# Altium PCB 21-LAN.PcbDoc
Units mm, origin at the board's own origin, x right, y up, seen from the top; angles counter-clockwise.
Board outline 40 x 40 mm, 4 copper layers (Top Layer, Internal Plane 1, Internal Plane 2, Bottom Layer), stack 0.462 mm thick; 32 components, 30 nets, 130 pads, 0 vias.
Unrouted connection lines stored in the file: 82.
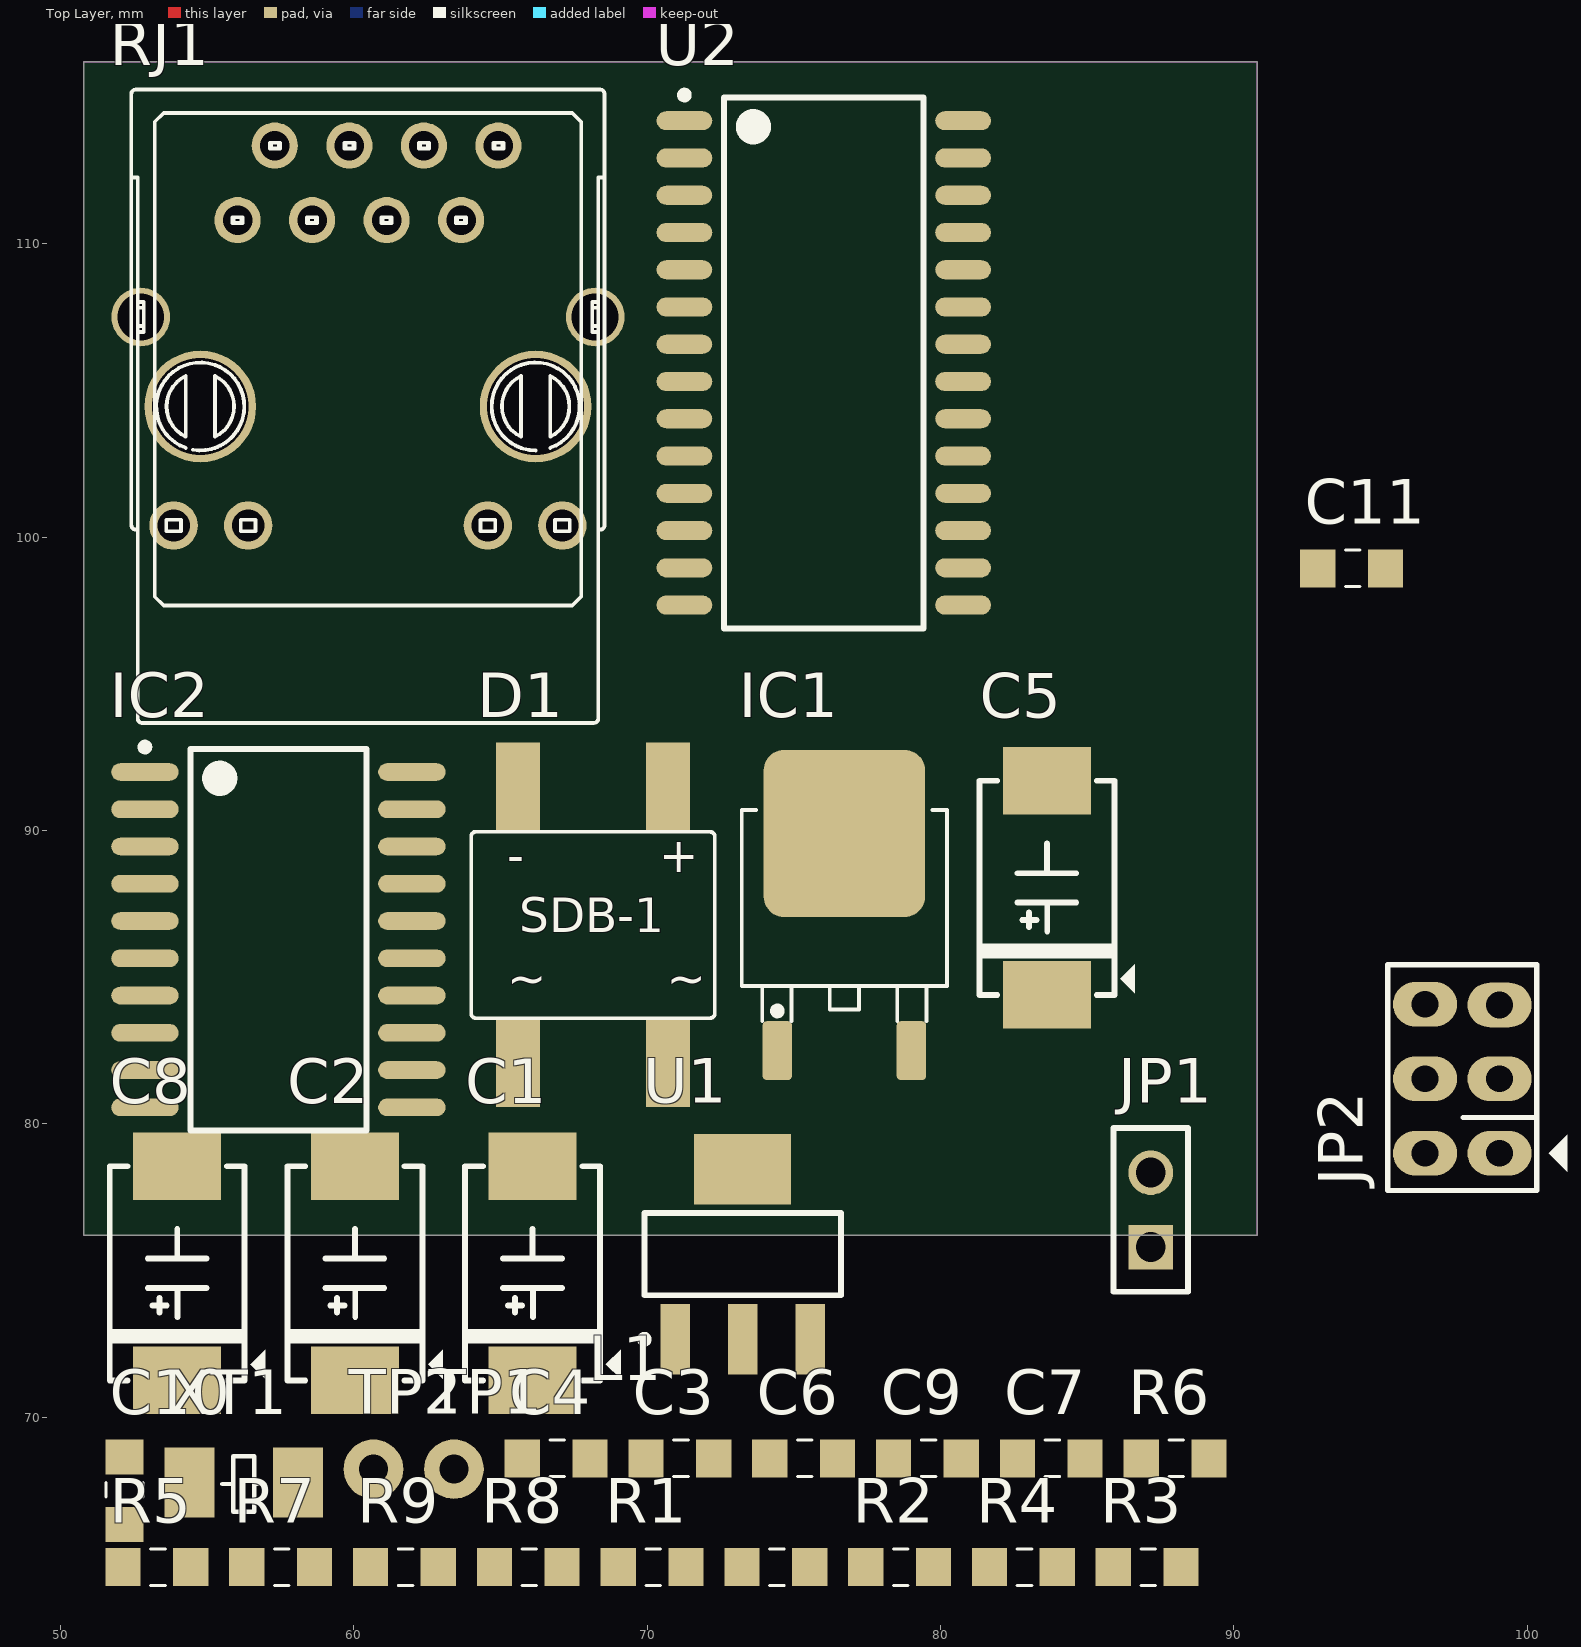
[diagram p0: Top Layer view]
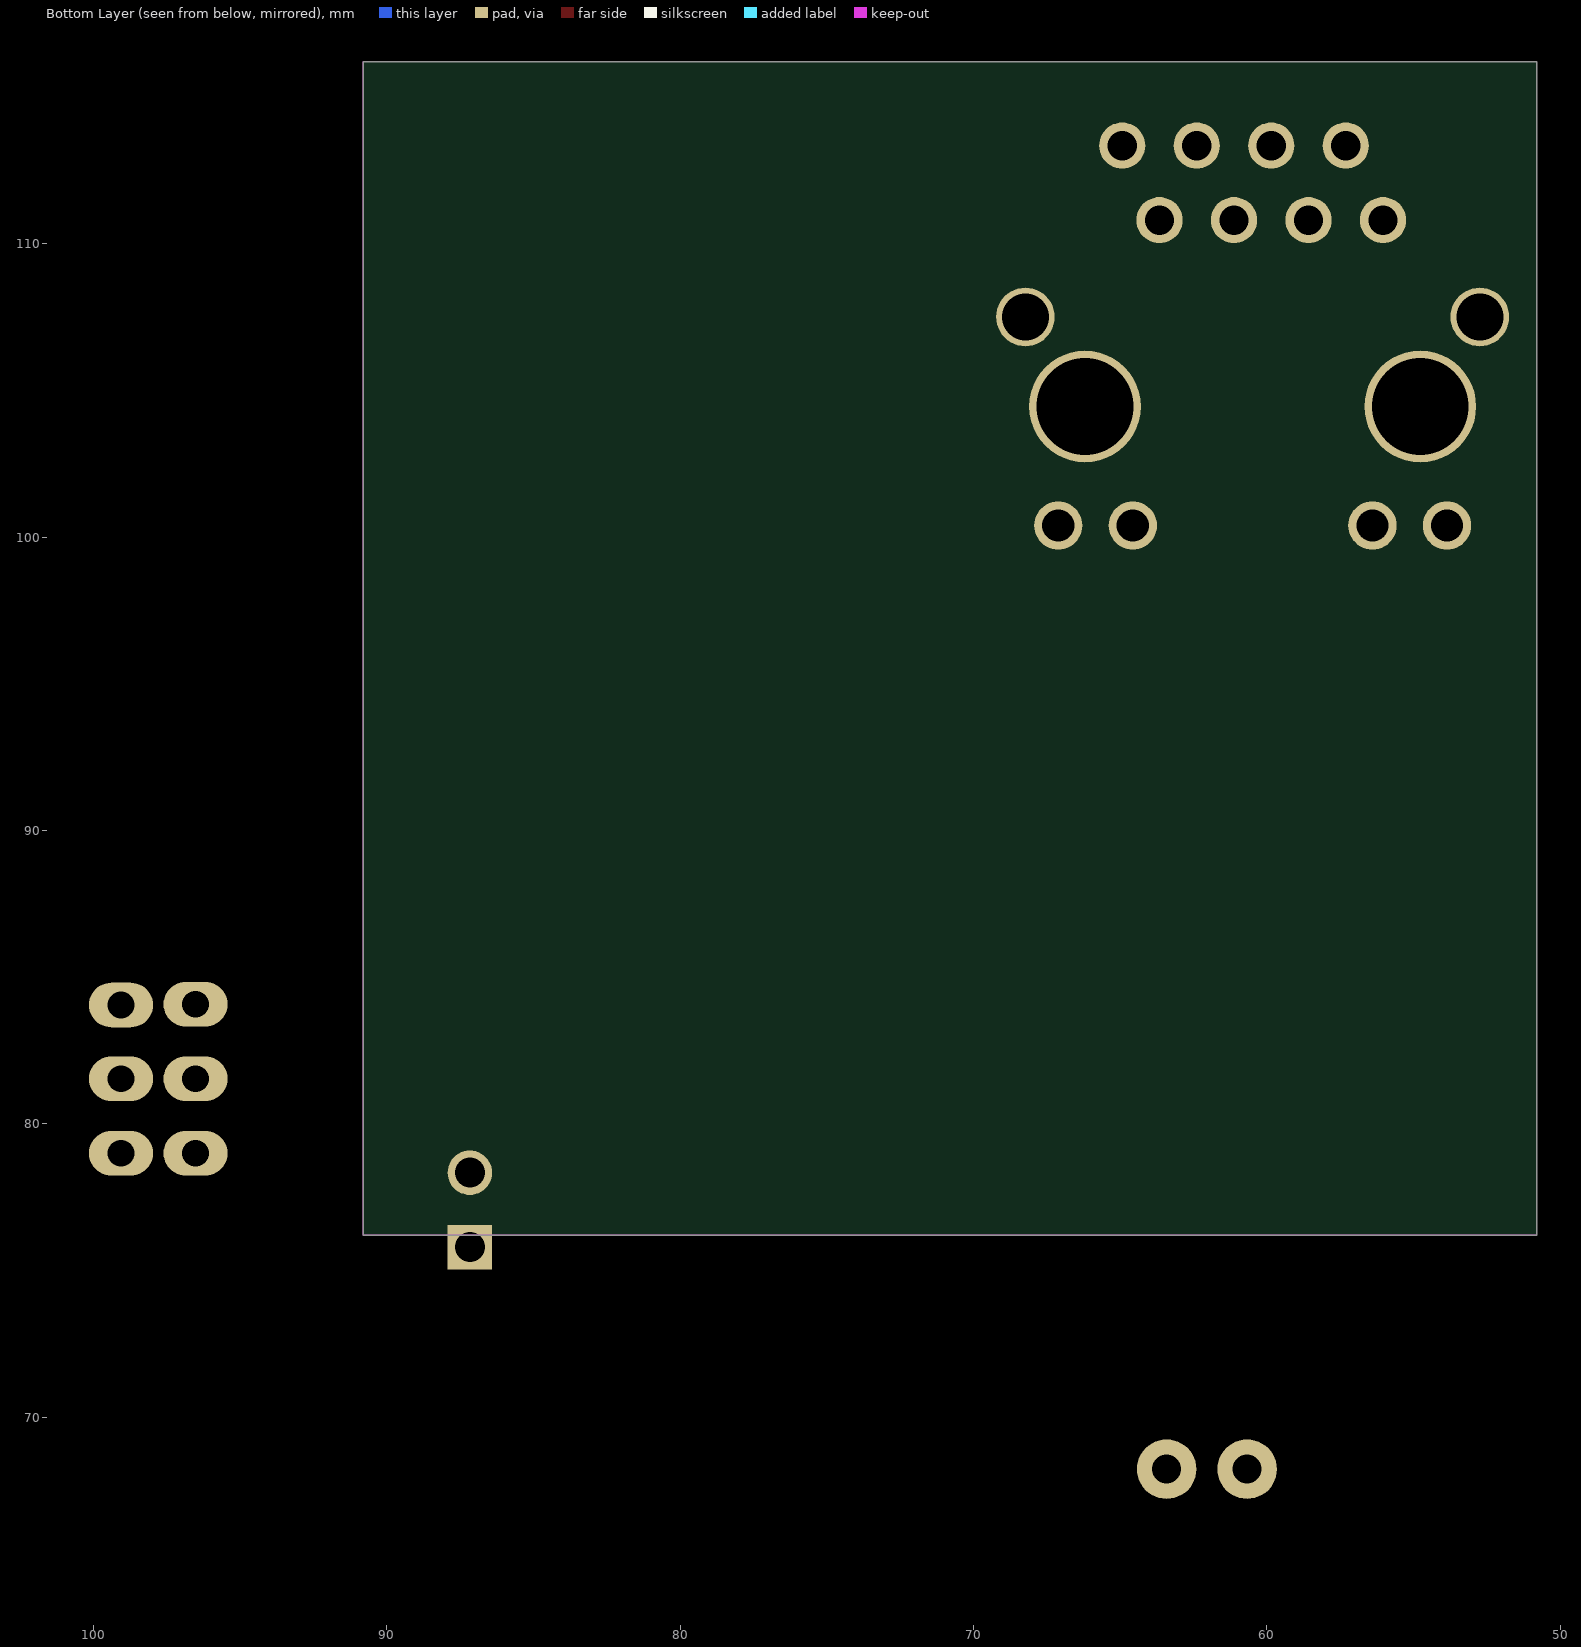
[diagram p1: Bottom Layer view, seen from below]
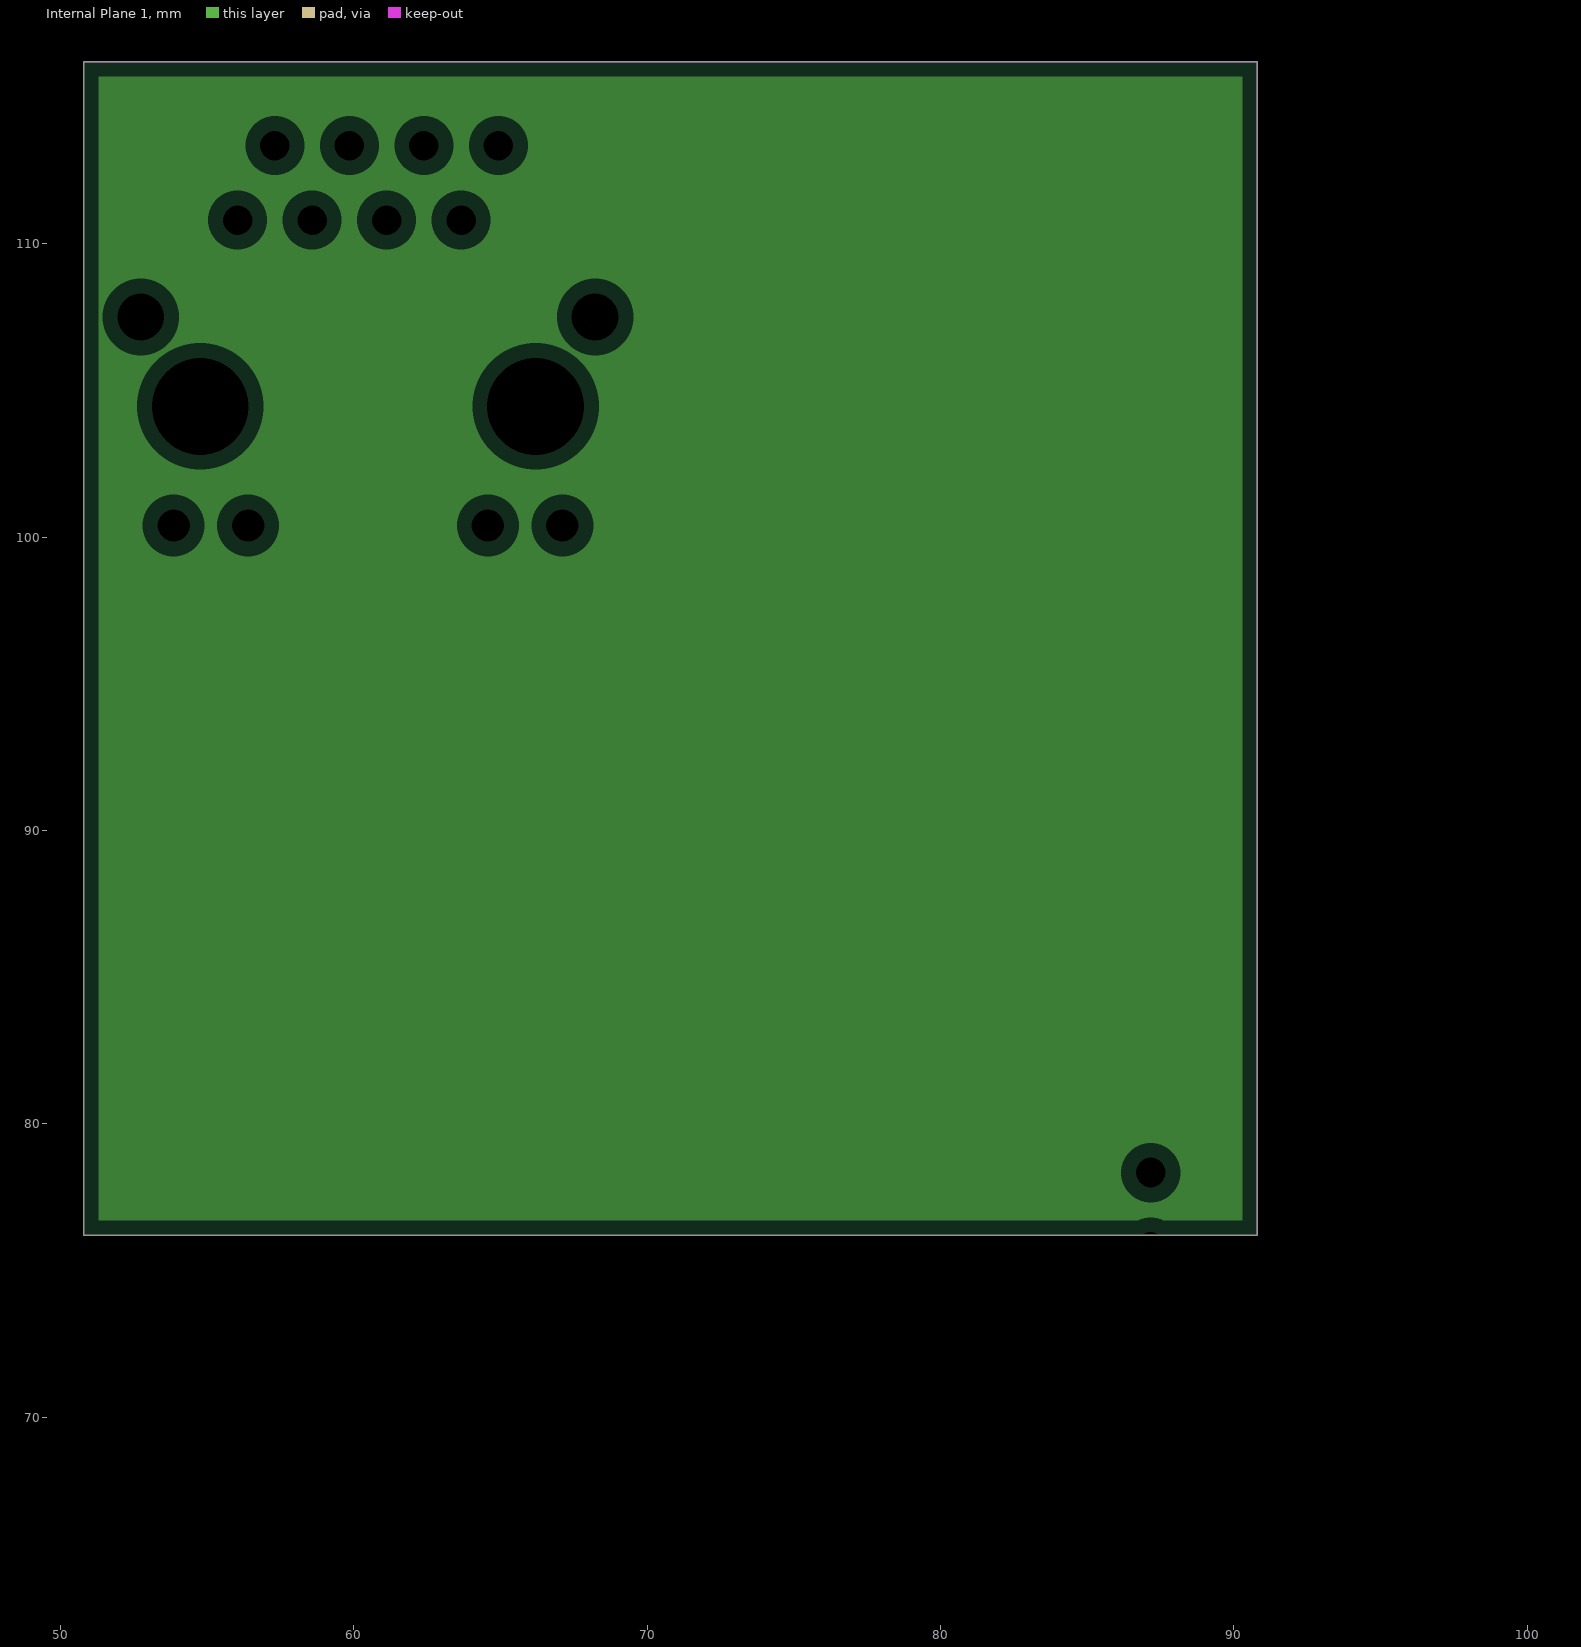
[diagram p2: Internal Plane 1, clearances drawn from the general rule]
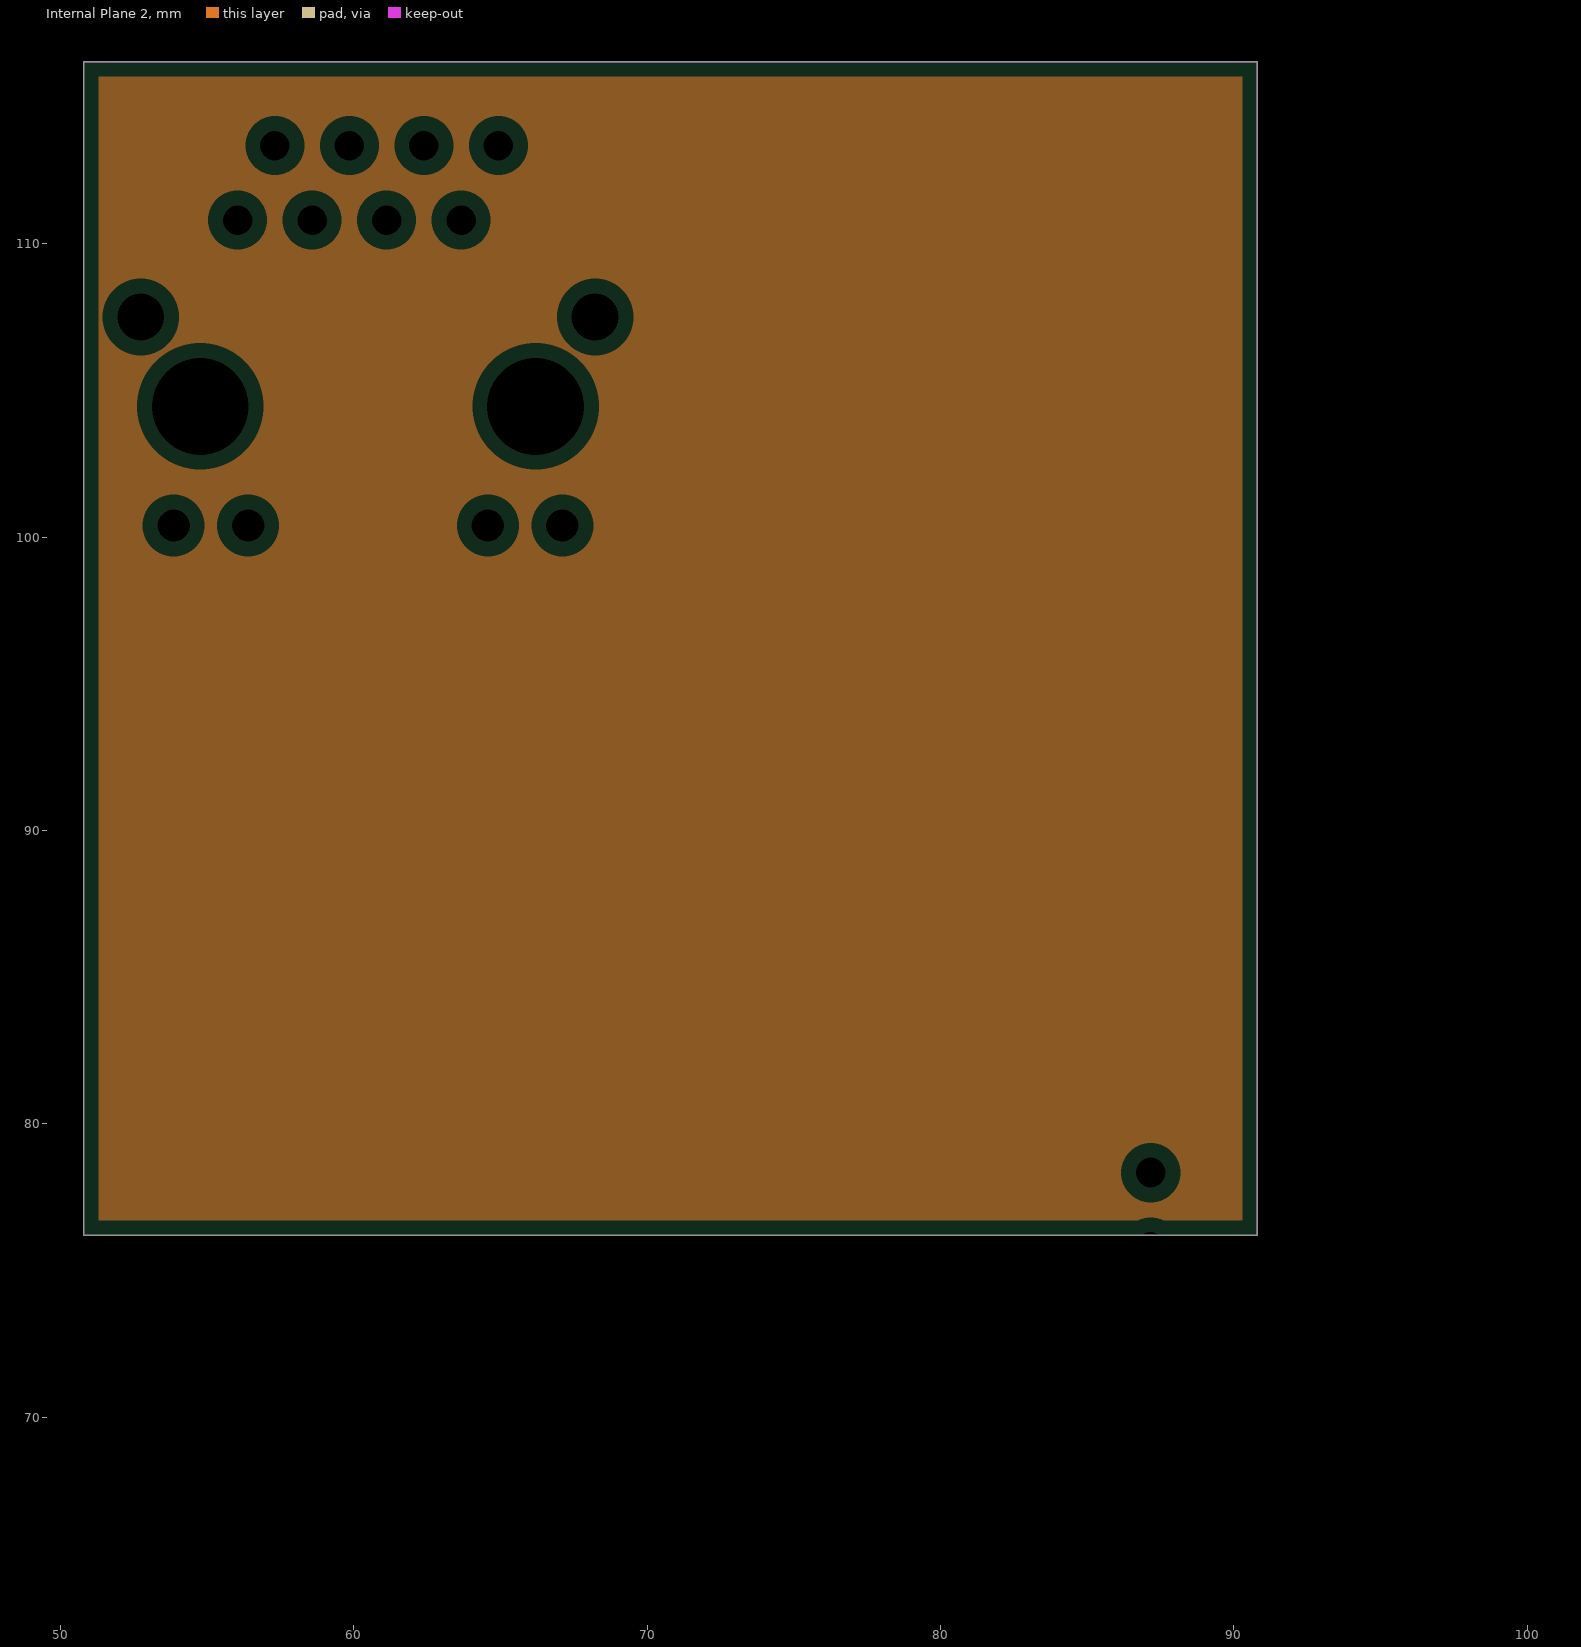
[diagram p3: Internal Plane 2, clearances drawn from the general rule]

## Layer stack, top to bottom
Top Solder: solder mask 0.0102, Solder Resist, Dk 3.5
Top Layer: signal copper 0.0356
Internal Plane 1: plane copper 0.0356
Internal Plane 2: plane copper 0.0356
Dielectric 1: dielectric 0.32, FR-4, Dk 4.8
Bottom Layer: signal copper 0.0356
Bottom Solder: solder mask 0.0102, Solder Resist, Dk 3.5

## Board outline
50.8,76.2 90.8,76.2 90.8,116.2 50.8,116.2

## Design rules (kind name [scope] priority, off if disabled: settings)
Clearance [All] p1: gap=0.2 ignorepadtopadclearanceinfootprint=FALSE
PlaneClearance [All] p1: clearance=0.508
PlaneConnect [All] p1: planeconnectstyle=Relief reliefexpansion=0.508 reliefentries=4 reliefconductorwidth=0.254 reliefairgap=0.254
PolygonConnect [All] p1: connectstyle=Relief reliefconductorwidth=0.254 reliefentries=4 polygonreliefangle="90 Angle" airgapwidth=0.254
RoutingVias [All] p1: holewidth=0.6 width=1 viastyle="Through Hole" minholewidth=0.711 minwidth=1.27 maxholewidth=0.711 maxwidth=1.27
SolderMaskExpansion [All] p1: expansion=0.102
Width [All] p1: maxlimit=0.2 minlimit=0.2 preferedwidth=0.2
28 further rules are at their usual default settings.

## Components (designator, comment, footprint, x,y, rotation, side; value= is the part's Value field where it differs from the comment)
C1 "470uF/16V" C-TANT-7343 66.101,74.904 r90 top
C2 "470uF/16V" C-TANT-7343 60.043,74.904 r90 top
C3 "100nF" CER-0805 71.081,68.594 r0 top
C4 "100nF" CER-0805 66.862,68.594 r0 top
C5 "470uF/16V" C-TANT-7343 83.632,88.041 r90 top
C6 "100nF" CER-0805 75.301,68.594 r0 top
C7 "0.01uF" CER-0805 83.741,68.594 r0 top
C8 "10uF/16V" C-TANT-7343 53.985,74.904 r90 top
C9 "0.01uF" CER-0805 79.521,68.594 r0 top
C10 "18pF" CER-0805 52.187,67.452 r90 top
C11 "18pF" CER-0805 93.98,98.933 r0 top
D1 "DB 1A" D-DB-1A-SMD 68.157,86.776 r0 top
IC1 "LM7805" TO252-123 76.726,86.195 r0 top
IC2 "74HC245" SO-20B 57.435,86.276 r0 top
JP1 "JP2" JP2-C1T 87.169,75.793 r90 top
JP2 "Connector 3x2" JP3x2 97.79,81.534 r90 top
L1 "Inductor" CER-0805 74.352,64.886 r0 top value=10uH
R1 "50" RES-0805 70.208,64.886 r0 top
R2 "50" RES-0805 78.648,64.886 r0 top
R3 "50" RES-0805 87.087,64.886 r0 top
R4 "1k" RES-0805 82.868,64.886 r0 top
R5 "50" RES-0805 53.329,64.886 r0 top
R6 "1k" RES-0805 88.037,68.594 r0 top
R7 "10K" RES-0805 57.549,64.886 r0 top
R8 "10K" RES-0805 65.988,64.886 r0 top
R9 "2.2K" RES-0805 61.769,64.886 r0 top
RJ1 "RJ45" "RJ45 Tranfomer" 56.043,110.802 r0 top
TP1 "1" TP 63.418,68.228 r0 top
TP2 "1" TP 60.675,68.228 r0 top
U1 "LM1117-3.3V" SOT223 73.259,75.554 r0 top
U2 "ENC28J60" "SOP 28N" 76.024,105.936 r0 top
XT1 "25MhZ" "XT SMD5032" 54.398,67.771 r0 top

## Footprints (in the part's own frame and the unit in brackets; to place one, negate y for a bottom-side part, rotate by r counter-clockwise, add the part's x,y. Pads: shape width x height; smd on the part's side, far side on the other; paste and mask are expansions set on the pad)
C-TANT-7343 [mm] "Tantalium Capacitor 7343-31"
  rect 2.3x3 smd: 1(-3.65,0) 2(3.65,0)
  silkscreen extent -3.65,-3 3.65,2.3, body extent -3.79,-2.3 3.81,2.3, height 3.1
CER-0805 [mm]
  rect 1.2x1.3 smd: 1(-1.116,0) 2(1.192,0)
  silkscreen extent -0.17,-0.63 0.33,0.63, body extent -0.97,-0.65 1.03,0.6, height 0.8
D-DB-1A-SMD [mm] "DB106S"
  rect 1.5x3 smd: 1(-2.55,-4.713) 2(2.55,-4.713) 3(2.55,4.713) 4(-2.55,4.713)
  silkscreen extent -4.15,-3.18 4.15,3.18, body extent -4.15,-4.95 4.15,4.95, height 3.35
JP2-C1T [mm] "2 row, straight, gold plating"
  rect 1.52x1.52 hole 1.02: 1(0,0)
  round 1.52 hole 1.02: 2(2.54,0)
  silkscreen extent -1.52,-1.27 4.06,1.27, body extent -1.52,-1.25 4.06,1.25, height 8.51
JP3x2 [mil] "Connector 3x2"
  oval 60x86 hole 36: 1(-100,-50) 2(0,-50) 3(99,-50) 4(-100,50) 5(0,50) 6(100,50)
  silkscreen extent -150,-141 153,100, body extent -150,-100 150,100, height 335
RES-0805 [mm]
  rect 1.2x1.3 smd: 1(-1.192,0) 2(1.116,0)
  silkscreen extent -0.25,-0.63 0.25,0.63, body extent -1.05,-0.62 0.95,0.63, height 0.5
"RJ45 Tranfomer" [mm]
  round 1.575 hole 1: 1(0,0) 2(1.27,2.54) 3(2.54,0) 4(3.81,2.54) 5(5.08,0) 6(6.35,2.54) 7(7.62,0) 8(8.89,2.54)
  round 1.65 hole 1.1: 9(0.36,-10.41) 10(-2.18,-10.41) 11(11.07,-10.41) 12(8.53,-10.41)
  round 3.81 hole 3.3: HM1(-1.27,-6.35) HM2(10.16,-6.35)
  round 2 hole 1.6: HM3(-3.3,-3.3) HM4(12.19,-3.3)
  silkscreen extent -3.62,-17.14 12.51,4.45, body extent -3.62,-17.14 12.51,4.45, height 13.84
SO-20B [mm] "SOIC, 20-Leads, Body 12.8x7.5mm, Pitch 1.27mm, IPC Medium Density"
  oval 2.3x0.6 smd: 1(-4.55,5.715) 2(-4.55,4.445) 3(-4.55,3.175) 4(-4.55,1.905) 5(-4.55,0.635) 6(-4.55,-0.635) 7(-4.55,-1.905) 8(-4.55,-3.175) 9(-4.55,-4.445) 10(-4.55,-5.715) 11(4.55,-5.715) 12(4.55,-4.445) 13(4.55,-3.175) 14(4.55,-1.905) 15(4.55,-0.635) 16(4.55,0.635) 17(4.55,1.905) 18(4.55,3.175) 19(4.55,4.445) 20(4.55,5.715)
  silkscreen extent -4.67,-6.5 3,6.69, body extent -4.04,-6.25 4.14,6.2, height 1.7
"SOP 28N" [mm] "SOP, 28-Leads, Body 17,86x7,46mm, Pitch 1,27mm, IPC Medium Density"
  oval 1.9x0.65 smd: 1(-4.75,8.255) 2(-4.75,6.985) 3(-4.75,5.715) 4(-4.75,4.445) 5(-4.75,3.175) 6(-4.75,1.905) 7(-4.75,0.635) 8(-4.75,-0.635) 9(-4.75,-1.905) 10(-4.75,-3.175) 11(-4.75,-4.445) 12(-4.75,-5.715) 13(-4.75,-6.985) 14(-4.75,-8.255) 15(4.75,-8.255) 16(4.75,-6.985) 17(4.75,-5.715) 18(4.75,-4.445) 19(4.75,-3.175) 20(4.75,-1.905) 21(4.75,-0.635) 22(4.75,0.635) 23(4.75,1.905) 24(4.75,3.175) 25(4.75,4.445) 26(4.75,5.715) 27(4.75,6.985) 28(4.75,8.255)
  silkscreen extent -4.87,-9.05 3.4,9.25, body extent -3.8,-9.05 3.8,9.05, height 2.65
SOT223 [mm]
  rect 1x2.4 smd: 1(-2.3,-2.9) 2(0,-2.9) 3(2.3,-2.9)
  rect 3.3x2.4 smd: 4(0,2.9)
  silkscreen extent -3.47,-3.02 3.35,1.4, body extent -3.25,-3.56 3.25,3.4, height 1.68
TO252-123 [mm]
  round 0.5 on Mech15: 0(0,0)
  rrect25% 1x2 smd: 1(-2.285,-3.7) 3(2.285,-3.7)
  rrect25% 5.5x5.7 smd: 2(0,3.7)
  silkscreen extent -3.5,-2.7 3.5,4.5, body extent -3.3,-3.95 3.3,5.76, height 2.31
TP [mil] "Connect 1"
  round 80 hole 39: TP1(0,0)
"XT SMD5032" [mm]
  rect 1.7x2.4 smd: 1(0,0) 2(3.7,0)
  silkscreen extent 1.12,-0.99 2.57,0.89, body extent -0.65,-1.63 4.35,1.57, height 1.3

## Part data
C1 C2 C5 C8: library part Capacitor
C3 C4 C6 C7 C9 C10 C11: library part Ceramic
D1: library part DB
IC1: library part LM78xx, "Positive Voltage Regulator", ComponentLink1Description="Manufacturer Link", ComponentLink1URL=http://www.st.com/, ComponentLink2Description=Datasheet, ComponentLink2URL=http://www.st.com/stonline/products/literature/ds/2146/l78m05c.pdf, DatasheetVersion=Apr-1994, LatestRevisionDate=17-Jul-2002, LatestRevisionNote="Re-released for DXP Platform.", Note="Tab is connected to pin 3 (GND).", PackageDescription="TO, Thru-Hole, Vertical, Heatsink Mounted; 3 In-Line Leads; Pitch 2.54 mm; Pin sequence 1, 3, 2", PackageReference=ISOWATT220AB, PackageVersion=Jul-1998, Published=24-Aug-2001, Publisher="Altium Limited"
IC2: library part 74245, "Octal bus tranceiver; 3-state", Copyright by=VanDungEvn@gmail.com
JP1: "WR-PHD 2.54 mm Angled Socket Header", Manufacturer="Würth Elektronik eiSos GmbH", partNo=613002143121, ComponentLink1 Description=Manufacturer, ComponentLink1URL=http://www.we-online.com, ComponentLink2 Description=Datasheet, ComponentLink2URL=http://katalog.we-online.de/em/datasheet/6130xx143121.pdf, Created by="Karrer Zheng", Created Date="29 March 2013", NoPins=02
JP2: library part JP3x2
R1 R2 R3 R4 R5 R6 R7 R8 R9: library part Res1/4W
RJ1: library part "RJ45 - Tranfomer"
TP1 TP2: library part TP, "CONNECT 1"
U1: library part LM1117, "800mA Low-Dropout Linear Regulator", Creator="Nguyen Ba Bien", Website=http://group3i.net
XT1: library part XT
L1: Code_IEC=1005, Code_JEITA=0402, LatestRevisionDate=29-May-2009, LatestRevisionNote="IPC-7351 Footprint Added.", PackageDescription="Chip Inductor", PackageReference=0402-A, Published=8-Jun-2000, Publisher="Altium Limited"

## Nets (pads, with @x,y where several pads share a name; then routed paths per layer and width w, separated by ;. In a path a pad name is that pad's centre, name@x,y a point inside that pad or via, vN(x,y) a via of type N, cw(c..) or ccw(c..) an arc to the next point about the centre after c; other vN are vias at no path point)
+3.3V: C5.1 C6.2 JP1.1 L1.2 R7.1 R8.1 U1.2 U2.15 U2.19 U2.20 U2.25 U2.28
+5V: C2.1 C4.2 IC1.3 IC2.20 U1.3
+12V: C1.1 C3.2 D1.4 IC1.1
AC1: D1.1 TP1.TP1
AC2: D1.2 TP2.TP1
CS: JP2.1 R7.2 U2.9
GND: C1.2 C2.2 C3.1 C4.1 C5.2 C6.1 C7.2 C8.2 C9.2 C10.2 C11.2 D1.3 IC1.2 IC2.1 IC2.10 IC2.19 JP1.2 R9.1 RJ1.8 RJ1.10 RJ1.11 U1.1 U2.2 U2.11 U2.18 U2.21 U2.22
INT: IC2.17 U2.4
LED1: R4.2 RJ1.12
LED2: R6.2 RJ1.9
NetC7_1: C7.1 R1.1 R2.1 RJ1.5
NetC8_1: C8.1 U2.1
NetC9_1: C9.1 L1.1 R3.1 R5.1 RJ1.4
NetIC2_2: IC2.2 JP2.4
NetIC2_3: IC2.3 JP2.5
NetIC2_4: IC2.4 JP2.6
NetR4_1: R4.1 U2.27
NetR6_1: R6.1 U2.26
NetR9_2: R9.2 U2.14
RST: R8.2 U2.10
SCK: JP2.2 U2.8
SI: JP2.3 U2.7
SO: IC2.18 U2.6
TPIN+: R2.2 RJ1.3 U2.13
TPIN-: R1.2 RJ1.6 U2.12
TPOUT+: R5.2 RJ1.1 U2.16
TPOUT-: R3.2 RJ1.2 U2.17
WOL: IC2.16 U2.5
XT1: C10.1 U2.24 XT1.2
XT2: C11.1 U2.23 XT1.1
pads on no net: IC1.0 IC2.5 IC2.6 IC2.7 IC2.8 IC2.9 IC2.11 IC2.12 IC2.13 IC2.14 IC2.15 RJ1.7 RJ1.HM1 RJ1.HM2 RJ1.HM3 RJ1.HM4 U1.4 U2.3

## Keep-outs
Keep-Out Layer:
  the board outline again, w0

## Dimensions
50.8,76.2 to 90.8,76.2 on Mechanical 1
50.8,76.2 to 50.8,116.2 on Mechanical 1

## Text inside footprints (layer, text, board x,y; h text height)
D1: Top Overlay "~        ~" at 65.236,83.982 h2; Top Overlay "-         +" at 65.236,88.173 h2; Top Overlay "SDB-1" at 65.649,86.136 h2